# EAGLE board lcd_booster_mk4 (EAGLE 6.1)
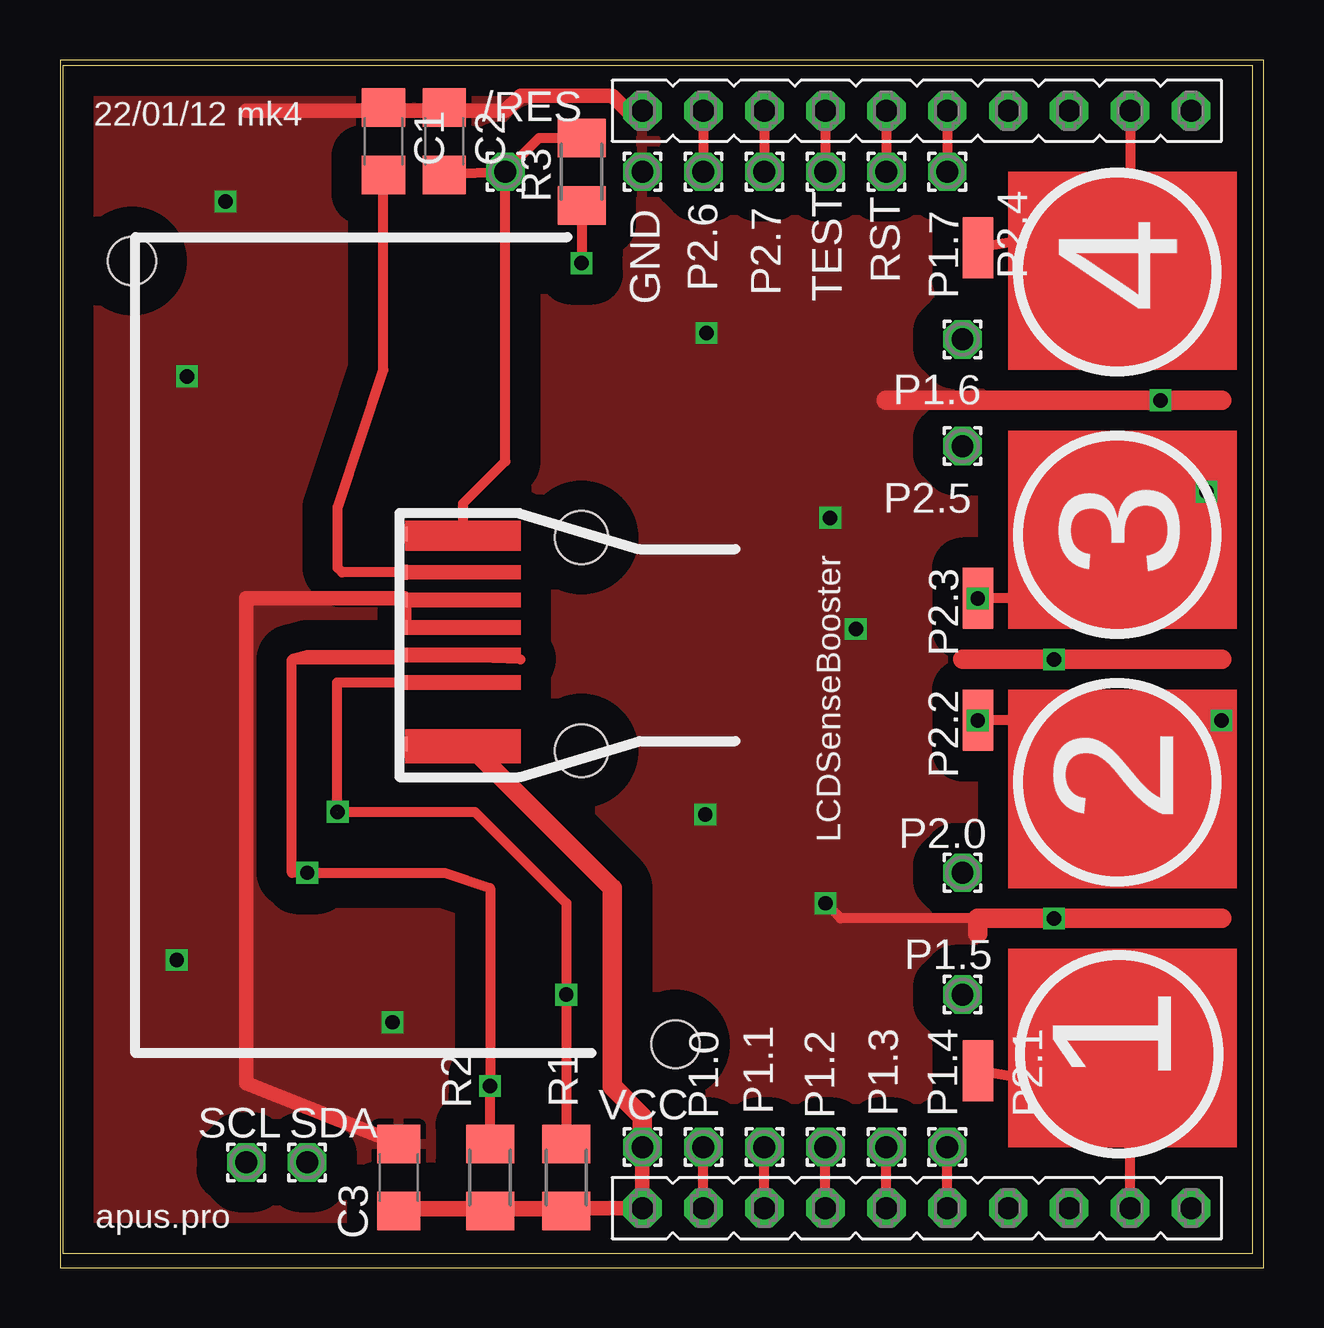
[diagram p0: board, top side]
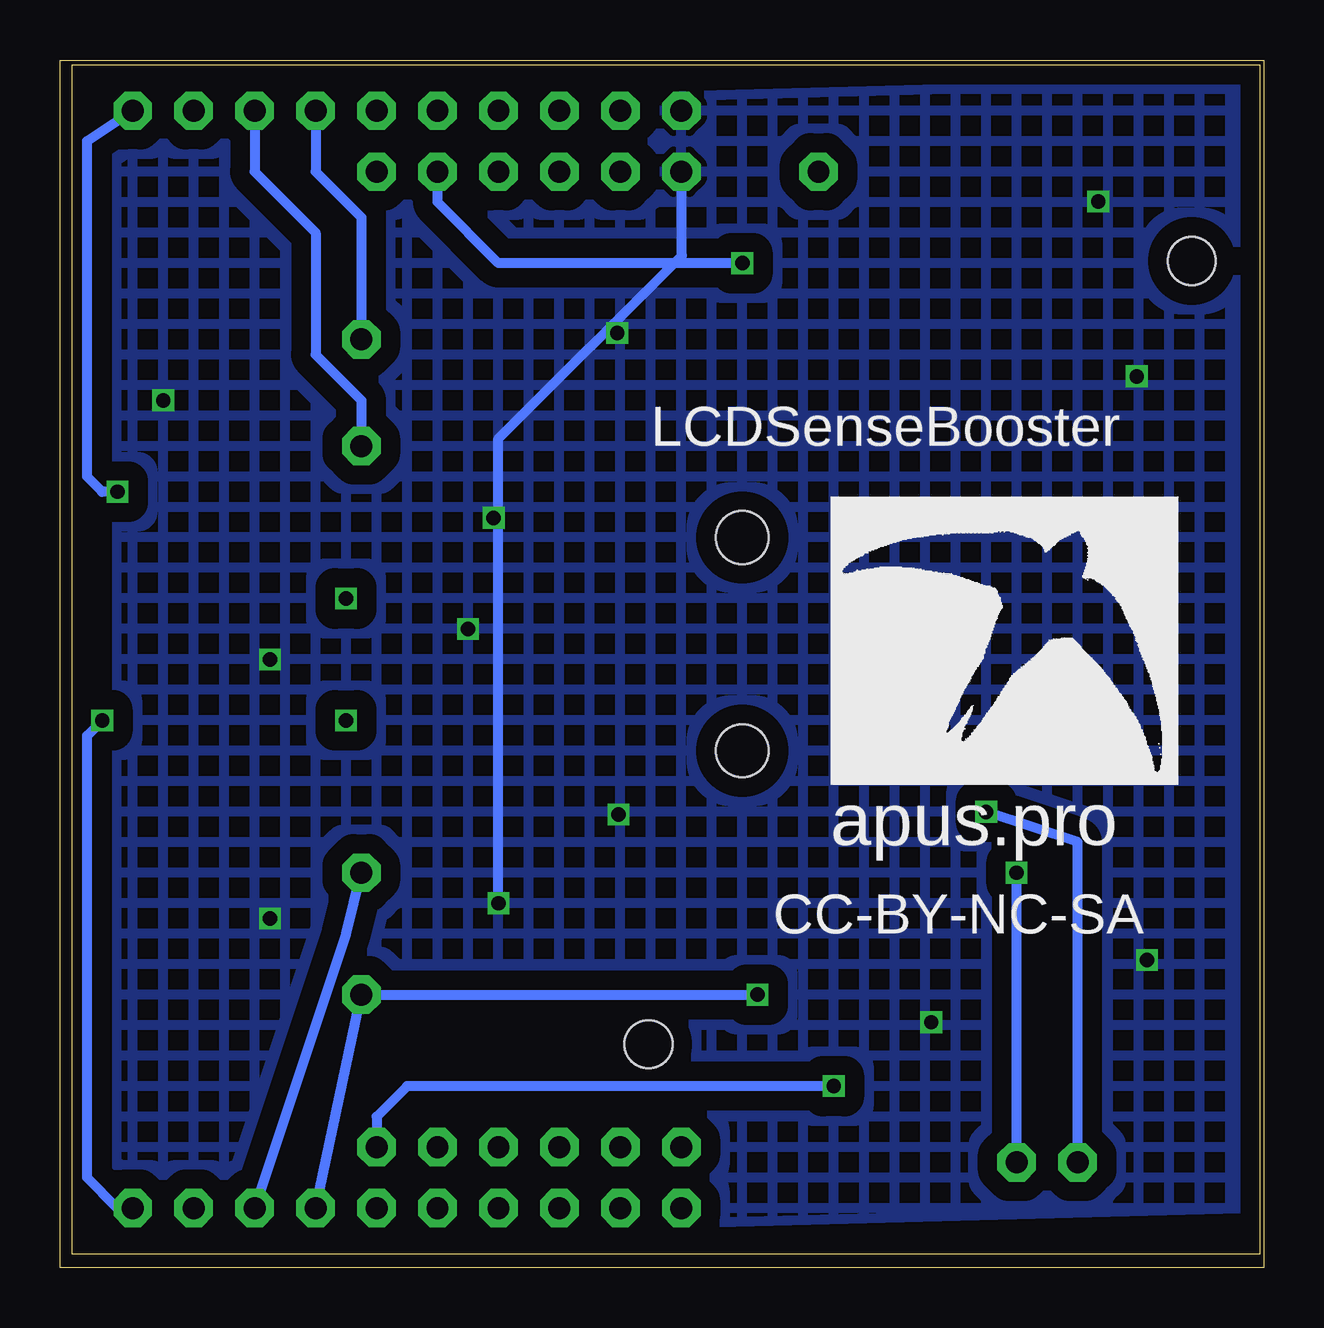
[diagram p1: board, bottom side, seen from below]

Size 50.16 x 50.33 mm. Coordinates in mm from the lower left corner, seen from the top.
Outline: 0,0 50.16,0 50.16,50.33 0,50.33 0,0
Copper layers (1*16): Top 0.035mm / dielectric 1.5mm / Bottom 0.035mm
Design rules: minimum track width 6mil, minimum drill 12mil, track to track 6mil, track to pad 6mil, pad to pad 6mil, via to via 6mil, smd to smd 0mil, copper to edge 10mil, drill to drill 10mil, minimum pad ring 10mil, minimum via ring 6mil, stop-mask expansion 2mil, vias tented up to drill 100mil, thermal gap 10mil
Holes 2.2 mm at 21.73,30.43 21.73,21.54
Holes 2 mm at 3.01,41.95 25.64,9.31

## Footprints (pad centres in the part's own frame; a part is rotated, then mirrored left to right if it is on the bottom)
1,6/0,9 = drill 0.914 pad 1.6 octagon: 1 0,0
C1206 = smd 1.6 x 1.8: 1 -1.4,0; 2 1.4,0
SMD1,27-2,54 = smd 1.27 x 2.54: 1 0,0
M1206 = smd 1.6 x 2: 1 -1.4,0; 2 1.4,0
PE9665ARF = smd 0.61 x 0.305: /RES 6.5,4.85; SAO 2.6,4.85; SCL 0.3,4.85; SDA 1.45,4.85; VDD -2.25,4.85; VLCD 4.9,4.85; VSS 3.75,4.85
LAUNCHPAD-50MM-LEFT = drill 0.914 pad 1.6 octagon: GND 24.13,48.26; P1.0 26.67,2.54; P1.1 29.21,2.54; P1.2 31.75,2.54; P1.3 34.29,2.54; P1.4 36.83,2.54; P1.5 39.37,2.54; P1.6 39.37,48.26; P1.7 36.83,48.26; P2.0 41.91,2.54; P2.1 44.45,2.54; P2.2 46.99,2.54; P2.3 46.99,48.26; P2.4 44.45,48.26; P2.5 41.91,48.26; P2.6 26.67,48.26; P2.7 29.21,48.26; RST 34.29,48.26; TEST 31.75,48.26; VCC 24.13,2.54

## Placement (x,y rotation side)
/RES  [1,6/0,9]  18.55,45.67 0 top
C1  [C1206]  13.48,46.94 270 top
C2  [C1206]  16.02,46.94 270 top
C3  [C1206]  14.11,3.76 90 top
GND  [1,6/0,9]  24.27,45.67 0 top
P1.0  [1,6/0,9]  26.81,5.03 0 top
P1.1  [1,6/0,9]  29.35,5.03 0 top
P1.2  [1,6/0,9]  31.89,5.03 0 top
P1.3  [1,6/0,9]  34.43,5.03 0 top
P1.4  [1,6/0,9]  36.97,5.03 0 top
P1.5  [1,6/0,9]  37.61,11.38 0 top
P1.6  [1,6/0,9]  37.61,38.69 0 top
P1.7  [1,6/0,9]  36.97,45.67 0 top
P2.0  [1,6/0,9]  37.61,16.46 270 top
P2.1  [SMD1,27-2,54]  38.24,8.21 0 top
P2.2  [SMD1,27-2,54]  38.24,22.81 0 top
P2.3  [SMD1,27-2,54]  38.24,27.89 0 top
P2.4  [SMD1,27-2,54]  38.24,42.5 180 top
P2.5  [1,6/0,9]  37.61,34.24 0 top
P2.6  [1,6/0,9]  26.81,45.67 0 top
P2.7  [1,6/0,9]  29.35,45.67 0 top
R1  [M1206]  21.09,3.76 90 top
R2  [M1206]  17.92,3.76 90 top
R3  [M1206]  21.73,45.67 90 top
RST  [1,6/0,9]  34.43,45.67 0 top
SCL  [1,6/0,9]  7.76,4.4 0 top
SDA  [1,6/0,9]  10.3,4.4 0 top
TEST  [1,6/0,9]  31.89,45.67 0 top
U$2  PE9665ARF  [PE9665ARF]  19.19,24.08 90 top
U$3  LAUNCHPAD-50MM-LEFT  [LAUNCHPAD-50MM-LEFT]  0.14,-0.05 0 top
VCC  [1,6/0,9]  24.27,5.03 0 top

## Library data of the parts
/RES GND P1.0 P1.1-P1.7 P2.0 P2.1-P2.7 RST SCL SDA TEST VCC = wirepad
C1-C3 = rcl
R1-R3 = resistor
U$2 = apus
U$3 = TI_launchpad

## Nets
/RES: /RES.1 C2.2 R3.2 U$2./RES
GND: C1.1 C2.1 C3.2 GND.1 U$2.SAO U$2.VSS U$3.GND
N$1: P2.2.1 U$3.P2.2
N$2: P1.6.1 U$3.P1.6
N$3: P1.0.1 U$3.P1.0
N$4: P2.1.1 U$3.P2.1
N$5: P1.3.1 U$3.P1.3
N$6: C1.2 U$2.VLCD
N$7: P1.7.1 U$3.P1.7
N$14: P1.2.1 U$3.P1.2
N$15: P1.1.1 U$3.P1.1
N$25: C3.1 R1.1 R2.1 U$2.VDD U$3.VCC VCC.1
P1.6: P1.5.1 R1.2 SCL.1 U$2.SCL U$3.P1.5
P2.0: P2.0.1 U$3.P2.0
P2.3: P2.3.1 U$3.P2.3
P2.4: P2.4.1 U$3.P2.4
P2.5: P2.5.1 U$3.P2.5
P2.6: P2.6.1 U$3.P2.6
P2.7: P2.7.1 U$3.P2.7
RST: R3.1 RST.1 U$3.RST
SDA: P1.4.1 R2.2 SDA.1 U$2.SDA U$3.P1.4
TEST: TEST.1 U$3.TEST

## Tracks (layer width: path | path; a pad name or v marks a point on that pad's centre or on a via)
/RES
  Top 0.406: /RES.1 18.69,45.67 C2.2 | R3.2 19.96,47.07 /RES.1 | 16.8,30.58 16.8,31.85 18.55,33.61 /RES.1
  Top 0.813: U$2./RES 16.8,30.58
GND  (via drill 0.6)
  Top 0.406: 38.24,14.55 32.52,14.55 v31.89,15.19
  Top 0.61: U$2.SAO U$2.VSS 14.34,27.89 7.76,27.89 7.76,7.7 C3.2 | U$3.GND 23.64,48.21 23,48.85 19.19,48.85 18.55,48.21 7.76,48.21
  Top 0.813: 48.4,25.35 v41.41,25.35 37.61,25.35 | 48.4,14.55 v41.41,14.55 38.24,14.55 38.24,13.92 | 48.4,36.15 v45.86,36.15 34.43,36.15
  Bottom 0.406: v31.89,15.19 31.89,34.54 24.25,42.18 24.25,45.65 GND.1
  other vias: 4.86,12.82 13.86,10.23 26.89,18.88 32.09,31.25 26.94,38.95 6.9,44.43 5.29,37.15 33.16,26.62
  pour Top (isolate 1.27): 0.78,1.85 49.04,1.85 49.04,49.48 0.78,49.48
  pour Bottom (isolate 0.813, hatched): 0.14,49.48 0.14,2.49 47.77,1.22 47.77,48.21
N$1  (via drill 0.6)
  Top 0.406: v48.4,22.81 P2.2.1
  Bottom 0.406: U$3.P2.2 47.77,2.49 49.04,3.76 49.04,22.18 v48.4,22.81
  other vias: 38.24,22.81
N$2
  Bottom 0.406: U$3.P1.6 39.51,45.67 37.61,43.77 P1.6.1
N$3
  Top 0.406: U$3.P1.0 P1.0.1
N$4
  Top 0.406: U$3.P2.1 44.59,5.03 42.05,7.57 P2.1.1
N$5
  Top 0.406: U$3.P1.3 P1.3.1
N$6
  Top 0.406: U$2.VLCD 11.75,28.98 11.57,29.16 11.57,31.7 13.48,37.42 C1.2 | C1.2 13.48,45.67 13.61,45.67 C1.2
N$7
  Top 0.406: U$3.P1.7 P1.7.1
N$14
  Top 0.406: U$3.P1.2 P1.2.1
N$15
  Top 0.406: U$3.P1.1 P1.1.1
N$25
  Top 0.152: 21.73,2.49 R1.1
  Top 0.406: C3.1 R2.1 21.6,2.36 21.73,2.49 U$3.VCC 24.14,2.62
  Top 0.61: U$2.VDD 14.34,21.54 17.29,21.54 | VCC.1 U$3.VCC 14.11,2.49
  Top 0.813: VCC.1 24.27,6.3 23,7.57 23,15.82 17.29,21.54
P1.6  (via drill 0.6)  (1 unrouted)
  Top 0.152: 21.73,5.03 R1.2
  Top 0.406: 21.73,5.03 21.09,5.03 R1.2 v21.09,11.38 21.09,15.19 17.29,19 v11.57,19 11.55,19 | U$2.SCL 11.54,24.38 11.54,22.81 | 11.54,22.81 11.54,18.99 11.55,19 | 11.55,19 11.55,22.8 11.54,22.81
  Bottom 0.406: U$3.P1.5 P1.5.1 v21.09,11.38 | SCL.1 7.76,17.75 11.55,19
P2.0
  Bottom 0.406: U$3.P2.0 38.24,13.92 P2.0.1
P2.3  (via drill 0.6)
  Top 0.406: v47.77,32.34 47.77,29.79 47.13,27.89 P2.3.1
  Bottom 0.406: U$3.P2.3 49.04,46.94 49.04,32.97 48.4,32.34 v47.77,32.34
  other vias: 38.24,27.89
P2.4
  Top 0.406: U$3.P2.4 44.59,45.67 42.05,43.13 P2.4.1
P2.5
  Bottom 0.406: U$3.P2.5 42.05,45.67 39.51,43.13 39.51,38.05 37.61,36.15 P2.5.1
P2.6
  Top 0.406: U$3.P2.6 P2.6.1
P2.7
  Top 0.406: U$3.P2.7 P2.7.1
RST  (via drill 0.6)
  Top 0.406: U$3.RST RST.1 | R3.1 v21.73,41.86
  Bottom 0.406: v21.73,41.86 31.89,41.86 34.43,44.4 RST.1
SDA  (via drill 0.6)
  Top 0.406: 19.19,25.35 U$2.SDA 10.3,25.53 9.67,25.35 | 9.67,25.35 9.67,16.46 v10.3,16.46 16.02,16.46 17.92,15.82 v17.92,7.57 R2.2 | 9.67,25.35 14.11,25.35 | R2.2 17.92,5.67 | R2.2 17.92,5.03 | U$3.P1.4 P1.4.1
  Bottom 0.406: v17.92,7.57 35.7,7.57 36.97,6.3 P1.4.1 | SDA.1 v10.3,16.46
TEST
  Top 0.406: U$3.TEST TEST.1
(copper drawn outside any net)
  shapes: Top area x4

## Text on the board
tPlace: 22/01/12 mk4 | 4 | 3 | 2 | LCDSenseBooster | 1 | apus.pro
bPlace: LCDSenseBooster | apus.pro | CC-BY-NC-SA